# Altium PCB PCB1.PcbDoc
Units mil, origin at the board's own origin, x right, y up, seen from the top; angles counter-clockwise.
Board outline 3682.03 x 2047.03 mil, 2 copper layers (Top Layer, Bottom Layer); 25 components, 27 nets, 105 pads, 6 vias.
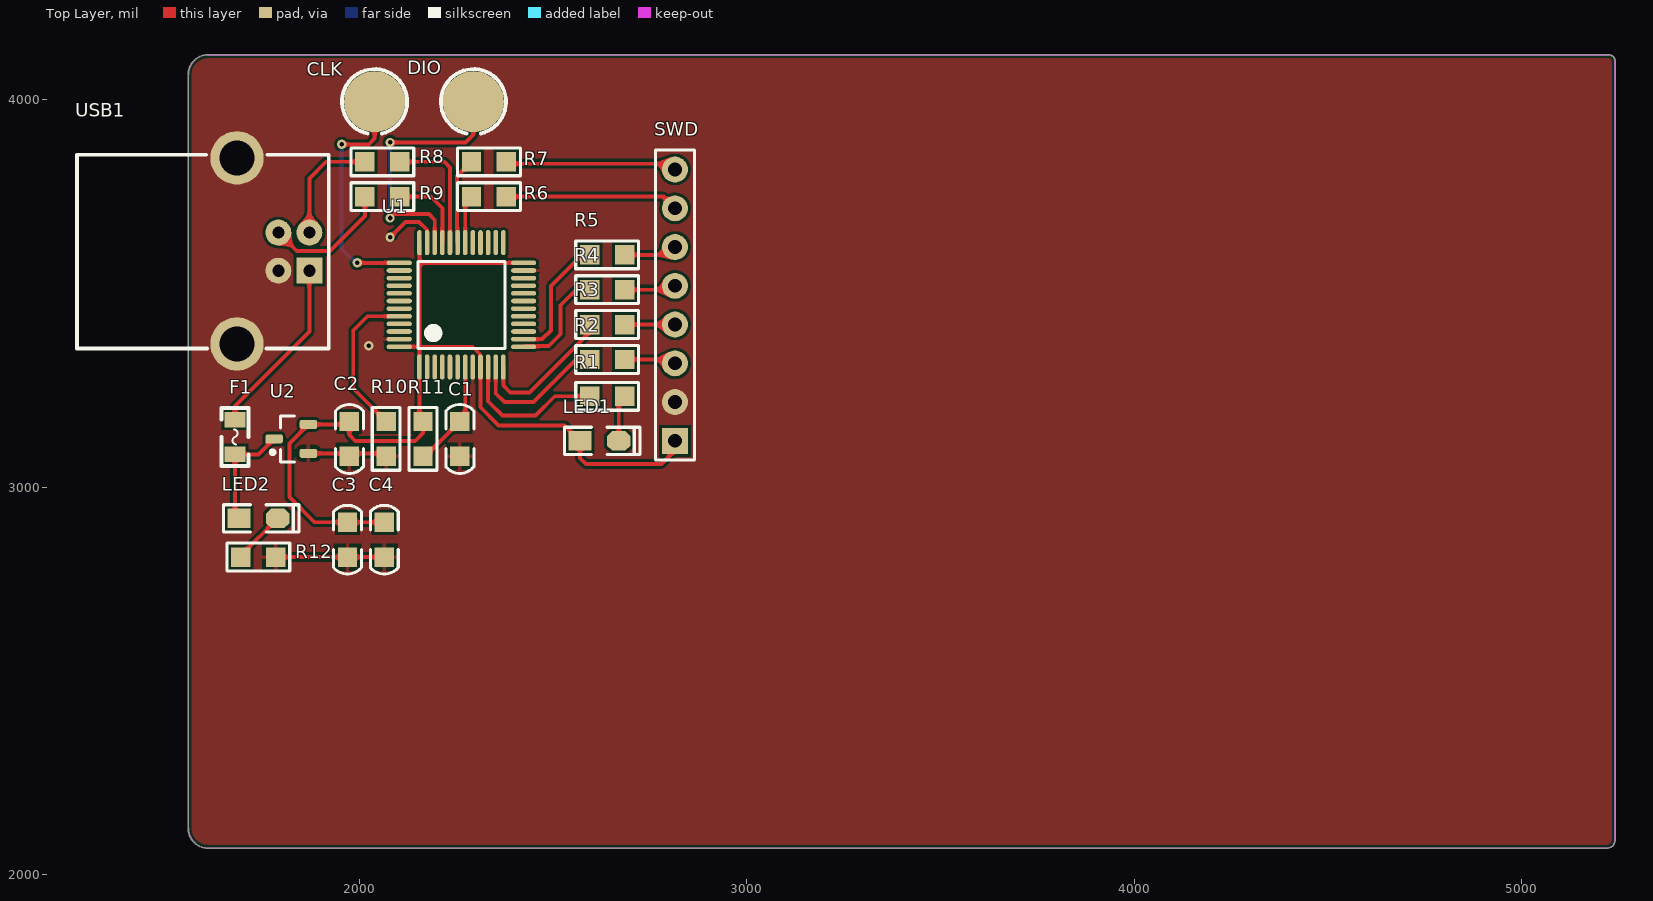
[diagram p0: Top Layer view]
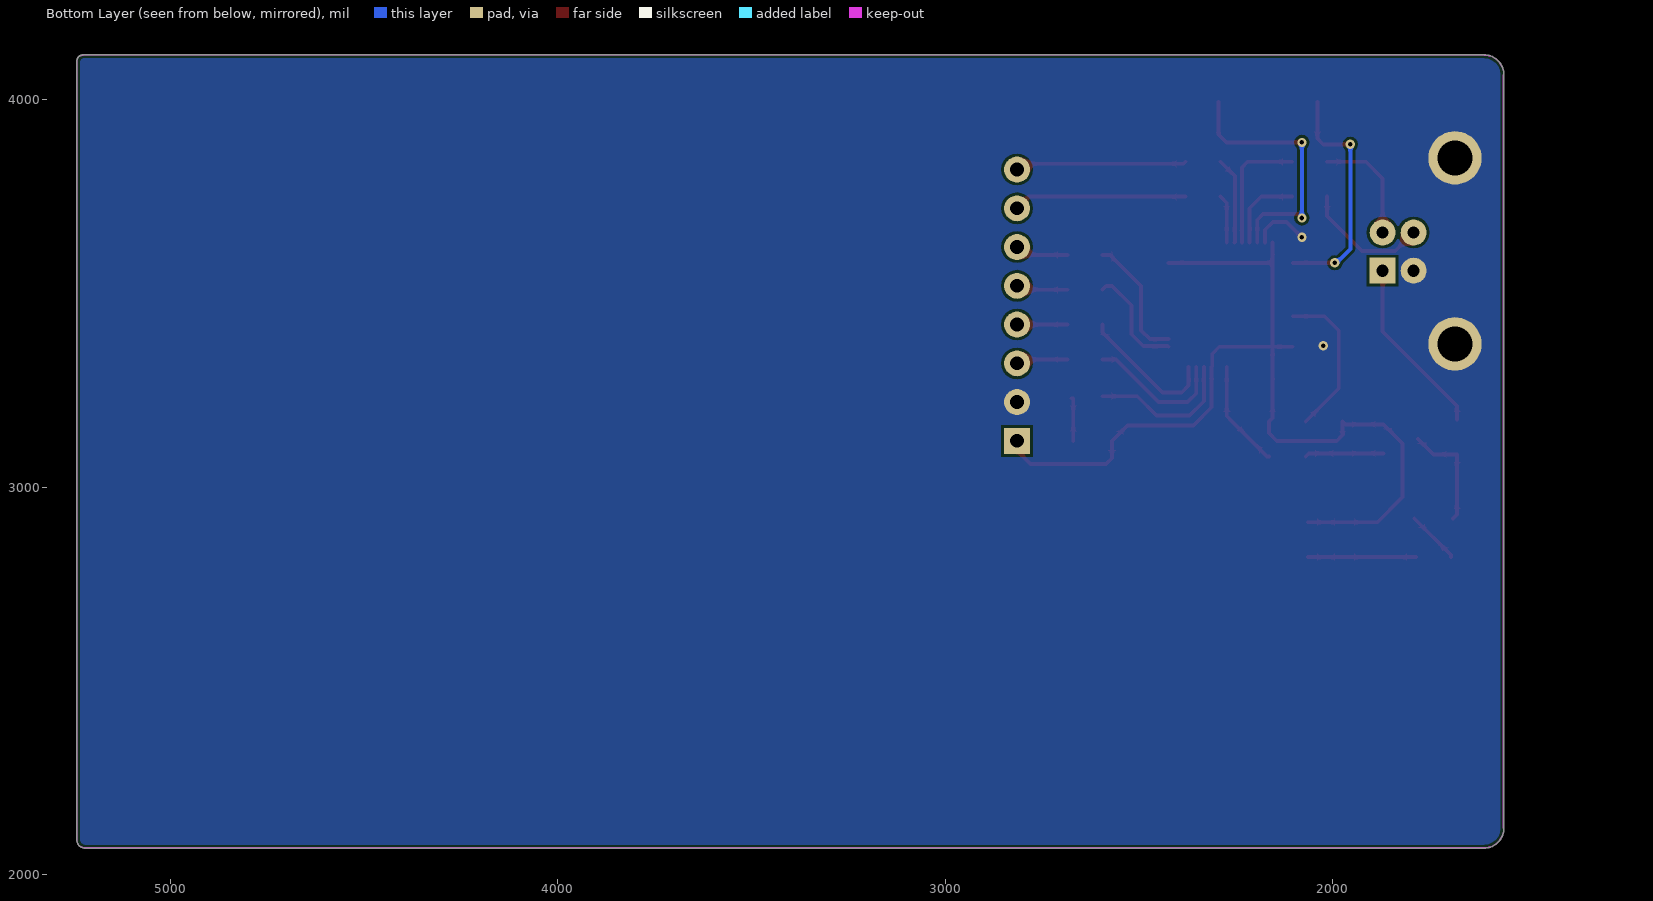
[diagram p1: Bottom Layer view, seen from below]

## Layer stack, top to bottom
Top Solder: solder mask 0.4, Solder Resist, Dk 3.5
Top Layer: signal copper 1.4
Dielectric 1: dielectric 12.6, FR-4, Dk 4.8
Bottom Layer: signal copper 1.4
Bottom Solder: solder mask 0.4, Solder Resist, Dk 3.5

## Board outline
1558.98,2120 1558.98,4065 cw(c1610,4065) 1610,4116.02 5225,4116.02 cw(c5225,4100) 5241.02,4100 5241.02,2090 cw(c5220,2090) 5220,2068.99 1610,2068.99 cw(c1610,2120)

## Design rules (kind name [scope] priority, off if disabled: settings)
Clearance [All] p1: gap=7 ignorepadtopadclearanceinfootprint=FALSE
PolygonConnect PolygonConnect_2 [All vs IsNamedPolygon('GND_L01_P000')] p1: thpad.connectstyle=Direct thpad.reliefconductorwidth=10 thpad.reliefentries=4 thpad.polygonreliefangle="90 Angle" thpad.airgapwidth=10 smdpad.connectstyle=Relief smdpad.reliefconductorwidth=10 smdpad.reliefentries=4 smdpad.polygonreliefangle="90 Angle" smdpad.airgapwidth=10 via.connectstyle=Direct via.reliefconductorwidth=10 via.reliefentries=4 via.polygonreliefangle="90 Angle" via.airgapwidth=10
PolygonConnect PolygonConnect_1 [All vs IsNamedPolygon('GND_L02_P001')] p2: thpad.connectstyle=Direct thpad.reliefconductorwidth=10 thpad.reliefentries=4 thpad.polygonreliefangle="90 Angle" thpad.airgapwidth=10 smdpad.connectstyle=Relief smdpad.reliefconductorwidth=10 smdpad.reliefentries=4 smdpad.polygonreliefangle="90 Angle" smdpad.airgapwidth=10 via.connectstyle=Direct via.reliefconductorwidth=10 via.reliefentries=4 via.polygonreliefangle="90 Angle" via.airgapwidth=10
PolygonConnect [All] p3: connectstyle=Relief reliefconductorwidth=10 reliefentries=4 polygonreliefangle="90 Angle" airgapwidth=10
RoutingVias [All] p1: holewidth=28 width=50 viastyle="Through Hole" minholewidth=28 minwidth=50 maxholewidth=28 maxwidth=50
SolderMaskExpansion [All] p1: expansion=4
Width [All] p1: maxlimit=10 minlimit=6 preferedwidth=10
30 further rules are at their usual default settings.

## Components (designator, comment, footprint, x,y, rotation, side; value= is the part's Value field where it differs from the comment)
C1 "104" "C 0805" 2260,3125 r90 top
C2 "104" "C 0805" 1975,3125 r90 top
C3 "104" "C 0805" 1970,2865 r90 top
C4 "104" "C 0805" 2065,2865 r90 top
CLK "TP" TP 2040,3995 r270 top
DIO "TP" TP 2295,3995 r270 top
F1 "" "FU 0805" 1680,3130 r270 top
LED1 "红色" "LED 0805G" 2620,3120 r0 top
LED2 "红色" "LED 0805R" 1740,2920 r0 top
R1 "470R" "R 0805-HP" 2640,3235 r180 top
R2 "100R" "R 0805-HP" 2640,3330 r180 top
R3 "100R" "R 0805-HP" 2640,3420 r180 top
R4 "100R" "R 0805-HP" 2640,3510 r180 top
R5 "100R" "R 0805-HP" 2640,3600 r180 top
R6 "100R" "R 0805-HP" 2335,3750 r180 top
R7 "100R" "R 0805-HP" 2335,3840 r180 top
R8 "22R" "R 0805-HP" 2060,3840 r0 top
R9 "22R" "R 0805-HP" 2060,3750 r0 top
R10 "10K" "R 0805-HP" 2070,3125 r90 top
R11 "10K" "R 0805-HP" 2165,3125 r270 top
R12 "1K" "R 0805-HP" 1740,2820 r0 top
SWD "HDR-1X8" HDR-1X8 2815,3120 r90 top
U1 "STM32F072C8T6" LQFP48P 2265,3470 r90 top
U2 "XC6206" XC6206 1825,3125 r270 top
USB1 "USB" USB-B/S_A 1791.69,3608.21 r270 top

## Footprints (in the part's own frame and the unit in brackets; to place one, negate y for a bottom-side part, rotate by r counter-clockwise, add the part's x,y. Pads: shape width x height; smd on the part's side, far side on the other; paste and mask are expansions set on the pad)
"C 0805" [mil] "无极性贴片电容"
  rect 50x50 smd: 1(-45,0) 2(45,0)
  silkscreen extent -89,-36 89,36, body extent -39,-24 39,24, height 20
"FU 0805" [mil] "贴片保险丝"
  rect 40x55 smd: 1(-45,0) 2(45,0)
  silkscreen extent -75,-35 75,35, body extent -39,-24 39,24, height 20
HDR-1X8 [mm] "排针，8脚"
  rect 1.7x1.7 hole 0.9: 1(0,0)
  round 1.7 hole 0.9: 2(2.54,0) 3(5.08,0) 4(7.62,0) 5(10.16,0) 6(12.7,0) 7(15.24,0) 8(17.78,0)
  silkscreen extent -1.27,-1.27 19.05,1.27, body extent -1.27,-1.27 19.05,1.27, height 8.5
"LED 0805G" [mil] "绿色0805LED"
  rect 60x50 smd: 1(-50,0)
  oct 60x50 smd: 2(50,0)
  silkscreen extent -90,-35 105,35, body extent -39,-25 39,25, height 32
"LED 0805R" [mil] "红色0805LED"
  rect 60x50 smd: 1(-50,0)
  oct 60x50 smd: 2(50,0)
  silkscreen extent -90,-35 105,35, body extent -39,-25 39,25, height 32
LQFP48P [mm]
  oval 1.65x0.3 smd: 1(-4.05,2.775) 2(-4.05,2.275) 3(-4.05,1.775) 4(-4.05,1.275) 5(-4.05,0.775) 6(-4.05,0.275) 7(-4.05,-0.225) 8(-4.05,-0.725) 9(-4.05,-1.225) 10(-4.05,-1.725) 11(-4.05,-2.225) 12(-4.05,-2.725) 25(4.1,-2.725) 26(4.1,-2.225) 27(4.1,-1.725) 28(4.1,-1.225) 29(4.1,-0.725) 30(4.1,-0.225) 31(4.1,0.275) 32(4.1,0.775) 33(4.1,1.275) 34(4.1,1.775) 35(4.1,2.275) 36(4.1,2.775)
  oval 0.3x1.65 smd: 13(-2.725,-4.05) 14(-2.225,-4.05) 15(-1.725,-4.05) 16(-1.225,-4.05) 17(-0.725,-4.05) 18(-0.225,-4.05) 19(0.275,-4.05) 20(0.775,-4.05) 21(1.275,-4.05) 22(1.775,-4.05) 23(2.275,-4.05) 24(2.775,-4.05) 37(2.775,4.1) 38(2.275,4.1) 39(1.775,4.1) 40(1.275,4.1) 41(0.775,4.1) 42(0.275,4.1) 43(-0.225,4.1) 44(-0.725,4.1) 45(-1.225,4.1) 46(-1.725,4.1) 47(-2.225,4.1) 48(-2.725,4.1)
  silkscreen extent -2.83,-2.82 2.87,2.88, body extent -4.48,-4.47 4.52,4.53, height 1.59
"R 0805-HP" [mil] "1/8W高精度贴片电阻"
  rect 50x50 smd: 1(-45,0) 2(45,0)
  silkscreen extent -81,-36 81,36, body extent -39,-25 39,25, height 20
TP [mm]
  round 4 smd: 1(0,0)
  silkscreen extent -2.13,-2.13 2.09,2.13
USB-B/S_A [mm] "b型USB 母座 16.3*13.7*11mm"
  rect 1.7x1.7 hole 0.8: 1(1.25,2.032)
  round 1.7 hole 0.8: 2(-1.25,2.032) 3(-1.25,0) 4(1.25,0)
  round 3.5 hole 2.3: 4(-6.141,-2.71) 4(6.051,-2.71)
  silkscreen extent -6.35,-13.21 6.35,3.3, body extent -6.86,-13.16 6.86,3.14, height 11.45
XC6206 [mm]
  rrect50% 0.6x1.15 smd: 1(0,-1.125) 2(0.95,1.125) 3(-0.95,1.125)
  silkscreen extent -1.5,-1.35 1.5,0.2, body extent -1.5,-1.5 1.5,1.5, height 1.3

## Part data
C1 C2 C3 C4: library part C, "无极性贴片电容", BOM名称=无极性贴片电容, 学习资源=https://lmdzstyle.taobao.com/, 版权归属=黎明电子style
F1: library part FU, "贴片保险丝", BOM名称=贴片保险丝, 学习资源=https://lmdzstyle.taobao.com/, 版权归属=黎明电子style
LED1 LED2: library part LED-SH-5MM, "5mm草帽LED", BOM名称=5mm草帽LED, 学习资源=https://lmdzstyle.taobao.com/, 版权归属=黎明电子style
R1 R2 R3 R4 R5 R6 R7 R8 R9 R10 R11 R12: library part R, "贴片电阻", BOM名称=贴片电阻, 学习资源=https://lmdzstyle.taobao.com/, 版权归属=黎明电子style
SWD: library part "Header 8", "8P接插件", BOM名称=8P接插件, 学习资源=https://lmdzstyle.taobao.com/, 版权归属=黎明电子style
USB1: library part USB-B/S, "USB-B型母接口", BOM名称=USB-B型母接口, 学习资源=https://lmdzstyle.taobao.com/, 版权归属=黎明电子style

## Via types
v1: diameter 24, hole 12, Top Layer to Bottom Layer, 6 vias

## Nets (pads, with @x,y where several pads share a name; then routed paths per layer and width w, separated by ;. In a path a pad name is that pad's centre, name@x,y a point inside that pad or via, vN(x,y) a via of type N, cw(c..) or ccw(c..) an arc to the next point about the centre after c; other vN are vias at no path point)
5V: F1.2 LED2.1 U2.1 | length 286.4
  Top Layer w10: LED2.1 1680,2930 F1.2 1740.71,3085 U2.1
GND: C1.1 C2.1 C3.1 C4.1 R10.1 R12.2 SWD.2 U1.8 U1.23 U1.35 U1.47 U2.2 USB1.4 | length 637.5
  Top Layer w10: R12.2 C3.1 C4.1 ; U2.2 2062.4,3087.6 R10.1 ; v1(2080,3645) 2120,3685 2155,3685 2175.43,3664.57 U1.35
  other v1: 2025,3365
J3V3: C2.2 C3.2 C4.2 LED1.1 R11.1 SWD.1 U1.1 U1.9 U1.24 U1.36 U1.48 U2.3 | length 2574.7
  Top Layer w10: C4.2 C3.2 1885,2910 1820,2975 1820,3113.11 U2.3 1967.4,3162.4 C2.2 1975,3135 1990,3120 2145,3120 2165,3140 R11.1 2155.75,3179.25 U1.1 2155.75,3361.95 ; U1.48 2155,3362.7 2155.75,3361.95 ; U1.36 2155.75,3579.24 ; U1.24 2155.75,3579.24 ; SWD.1 2815,3095 2780,3060 2585,3060 2570,3075 LED1.1 2530,3160 2360,3160 2313.23,3206.77 U1.9 2311.45,3312.32 2311.45,3344.53 2293.27,3362.7 2155.75,3362.7 ; 2155.75,3361.95 2155.75,3362.7 ; 2155.75,3362.7 2155.75,3579.24
NetC1_2: C1.2 R11.2 U1.7 | length 278.6
  Top Layer w10: R11.2 2170,3080 C1.2 2273.86,3183.86 U1.7
NetCLK_1: CLK.1 U1.37 | length 619.6
  Top Layer w10: v1(1955,3885) 2025,3885 2040,3900 CLK.1 ; v1(1995,3579.24) U1.37
  Bottom Layer w10: v1(1955,3885) 1955,3615 1990.76,3579.24 v1(1995,3579.24)
NetDIO_1: DIO.1 U1.34 | length 687.3
  Top Layer w10: v1(2080,3695) 2090,3705 2180,3705 2195.12,3689.88 U1.34 ; v1(2080,3890) 2275,3890 2295,3910 DIO.1
  Bottom Layer w10: v1(2080,3695) v1(2080,3890)
NetF1_1: F1.1 USB1.1 | length 463.4
  Top Layer w10: F1.1 1680,3210 1871.69,3401.69 USB1.1
NetLED1_2: LED1.2 R1.1 | length 115
  Top Layer w10: LED1.2 2670,3230 R1.1@2675,3230
NetLED2_2: LED2.2 R12.1 | length 139.4
  Top Layer w10: R12.1 1695,2825 LED2.2
NetR1_2: R1.2 U1.10 | length 386.6
  Top Layer w10: U1.10 2332.91,3222.09 2370,3185 2455,3185 2505,3235 R1.2
NetR2_2: R2.2 U1.11 | length 365.4
  Top Layer w10: U1.11 2352.6,3242.4 2375,3220 2450,3220 2560,3330 R2.2
NetR3_2: R3.2 U1.12 | length 362.1
  Top Layer w10: U1.12 2372.28,3262.72 2390,3245 2440,3245 2595,3400 R3.2
NetR4_2: R4.2 U1.13 | length 283.8
  Top Layer w10: U1.13 2426.23,3364.48 2489.48,3364.48 2520,3395 2520,3470 2570,3520 2585,3520 R4.2
NetR5_2: R5.2 U1.14 | length 328.1
  Top Layer w10: U1.14 2472.39,3382.39 2495,3405 2495,3520 2575,3600 R5.2
NetR6_2: R6.2 U1.30 | length 125.3
  Top Layer w10: U1.30 2273.86,3733.86 R6.2
NetR7_2: R7.2 U1.31 | length 224.4
  Top Layer w10: U1.31 2253,3632.57 2253,3803 R7.2
NetR8_1: R8.1 USB1.2 | length 300.5
  Top Layer w10: USB1.2 1871.69,3796.69 1915,3840 R8.1
NetR8_2: R8.2 U1.32 | length 329.6
  Top Layer w10: R8.2 2220,3840 2234.49,3825.51 U1.32
NetR9_1: R9.1 USB1.3 | length 330.2
  Top Layer w10: USB1.3 1839.12,3610 1925,3610 2015,3700 R9.1
NetR9_2: R9.2 U1.33 | length 210.9
  Top Layer w10: R9.2 2185,3750 2214.8,3720.2 U1.33
NetR10_2: R10.2 U1.44 | length 403.9
  Top Layer w10: R10.2 1985,3255 1985,3405 2021.44,3441.44 U1.44
NSRST: R2.1 SWD.3 | length 134.1
  Top Layer w10: R2.1 2805,3330 SWD.3
RX: R7.1 SWD.8 | length 443.3
  Top Layer w10: R7.1 2385,3835 2800,3835 SWD.8
SWCLK: R3.1 SWD.4 | length 130
  Top Layer w10: R3.1 SWD.4
SWDIO: R5.1 SWD.6 | length 138.3
  Top Layer w10: R5.1 2795,3600 SWD.6
SWO: R4.1 SWD.5 | length 134.1
  Top Layer w10: R4.1 2805,3510 SWD.5
TX: R6.1 SWD.7 | length 447.4
  Top Layer w10: R6.1 2785,3750 SWD.7
pads on no net: U1.2 U1.3 U1.4 U1.5 U1.6 U1.15 U1.16 U1.17 U1.18 U1.19 U1.20 U1.21 U1.22 U1.25 U1.26 U1.27 U1.28 U1.29 U1.38 U1.39 U1.40 U1.41 U1.42 U1.43 U1.45 U1.46

## Polygon pours and split planes (outlines as drawn)
GND on Top Layer "GND_L01_P000" (solid, remove dead copper, pour order 0): 1558.98,2120 1558.98,4065 cw(c1610,4065) 1610,4116.02 5225,4116.02 cw(c5225,4100) 5241.02,4100 5241.02,2090 cw(c5220,2090) 5220,2068.99 1610,2068.99 cw(c1610,2120)
GND on Bottom Layer "GND_L02_P001" (solid, remove dead copper, pour order 1): 1558.98,2120 1558.98,4065 cw(c1610,4065) 1610,4116.02 5225,4116.02 cw(c5225,4100) 5241.02,4100 5241.02,2090 cw(c5220,2090) 5220,2068.99 1610,2068.99 cw(c1610,2120)

## Keep-outs
Keep-Out Layer:
  lines w2: 1620,4115 1610,4115 ; 5205,4115 5225,4115 ; 1610,4115 ccw(c1610,4065) 1560,4065 1560,2120 ccw(c1610,2120) 1610,2070 5220,2070 ccw(c5220,2090) 5240,2090 5240,4100 ccw(c5225,4100) 5225,4115 ; 1610,4115 5225,4115

## Other copper
Top Layer:
  pour cut-out: 2155.75,3579.24 2156.51,3580 2385.72,3580 2385.72,3349.28 2181.81,3349.28 2155,3349.28